# Altium PCB PCB1.PcbDoc
Units mm, origin at the board's own origin, x right, y up, seen from the top; angles counter-clockwise.
Board outline 57.35 x 68.96 mm, 2 copper layers (Top Layer, Bottom Layer); 19 components, 15 nets, 79 pads, 2 vias.
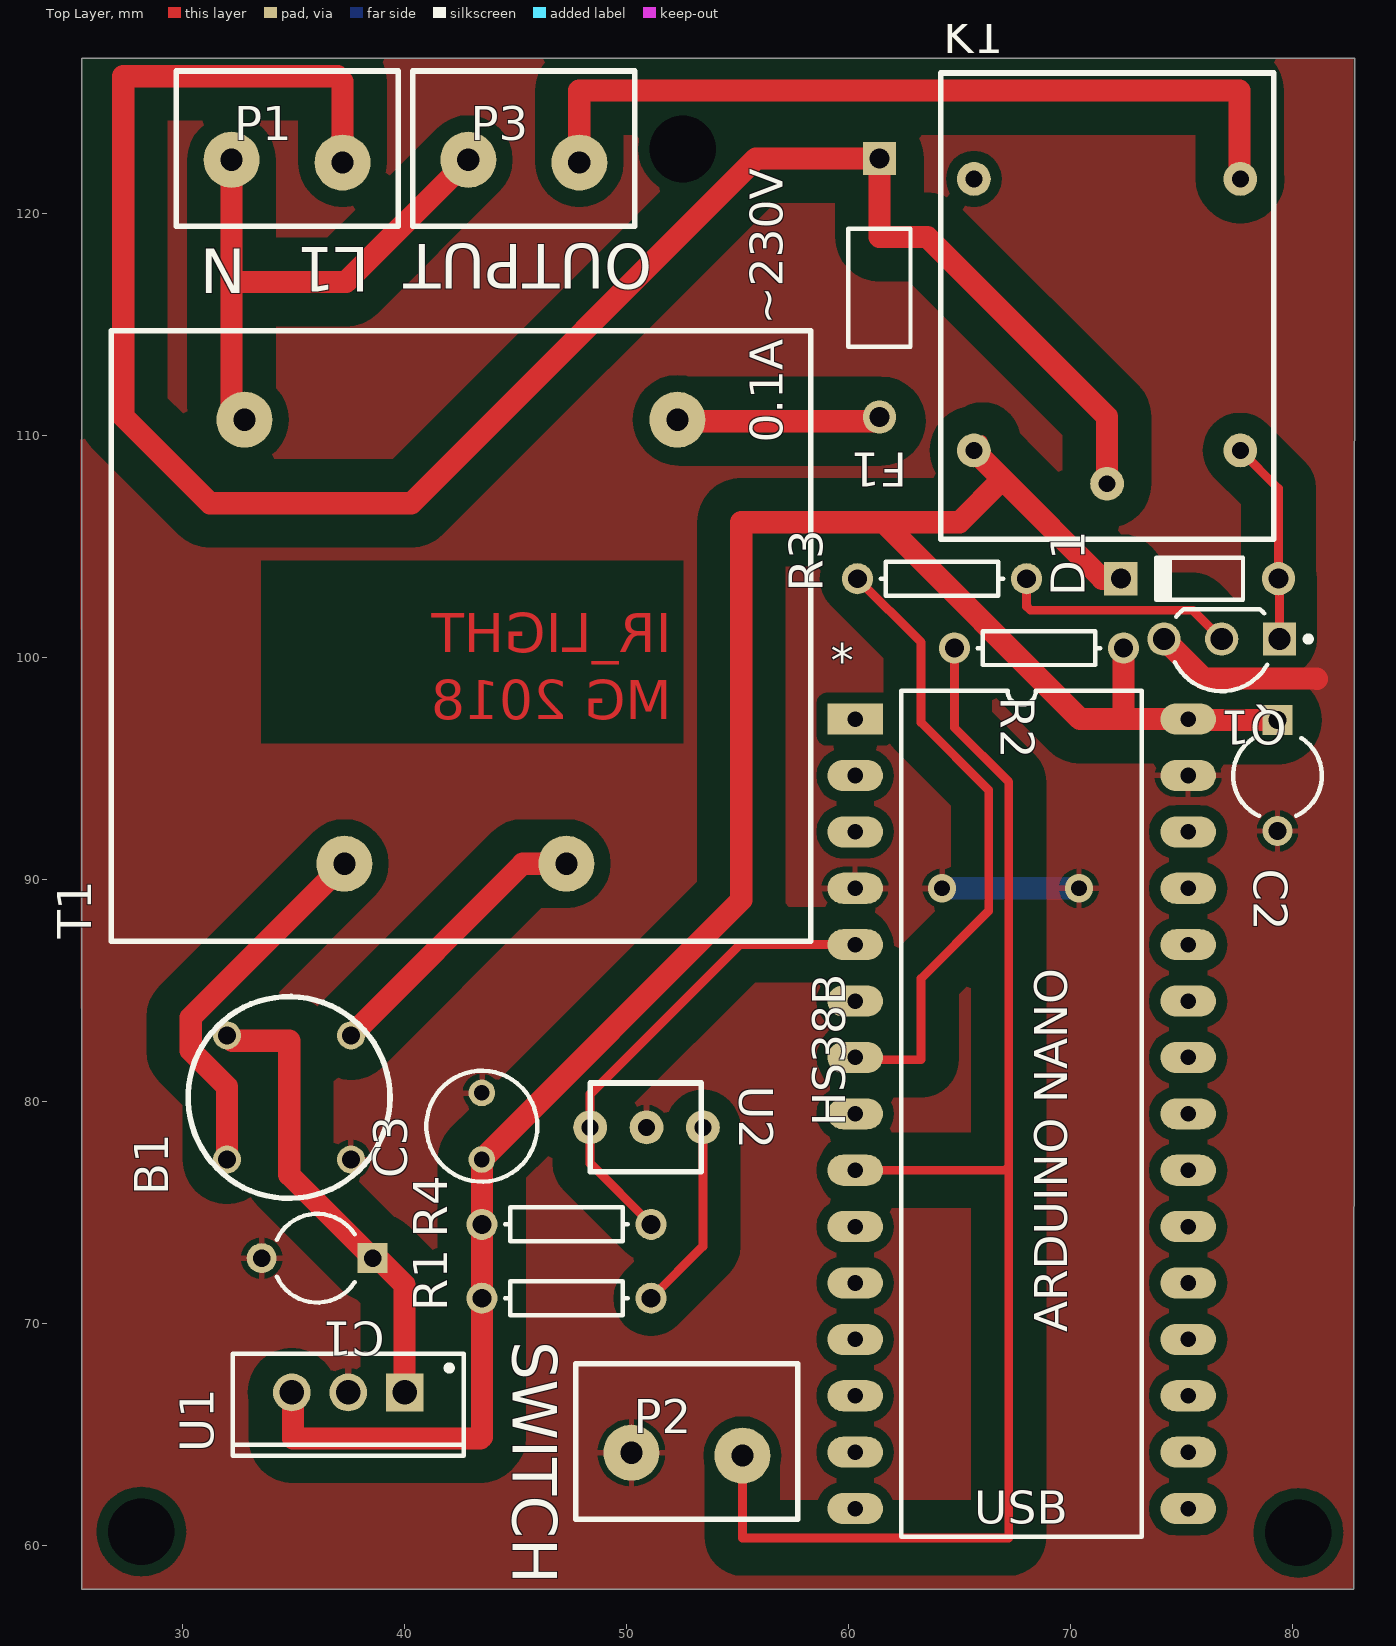
[diagram p0: Top Layer view]
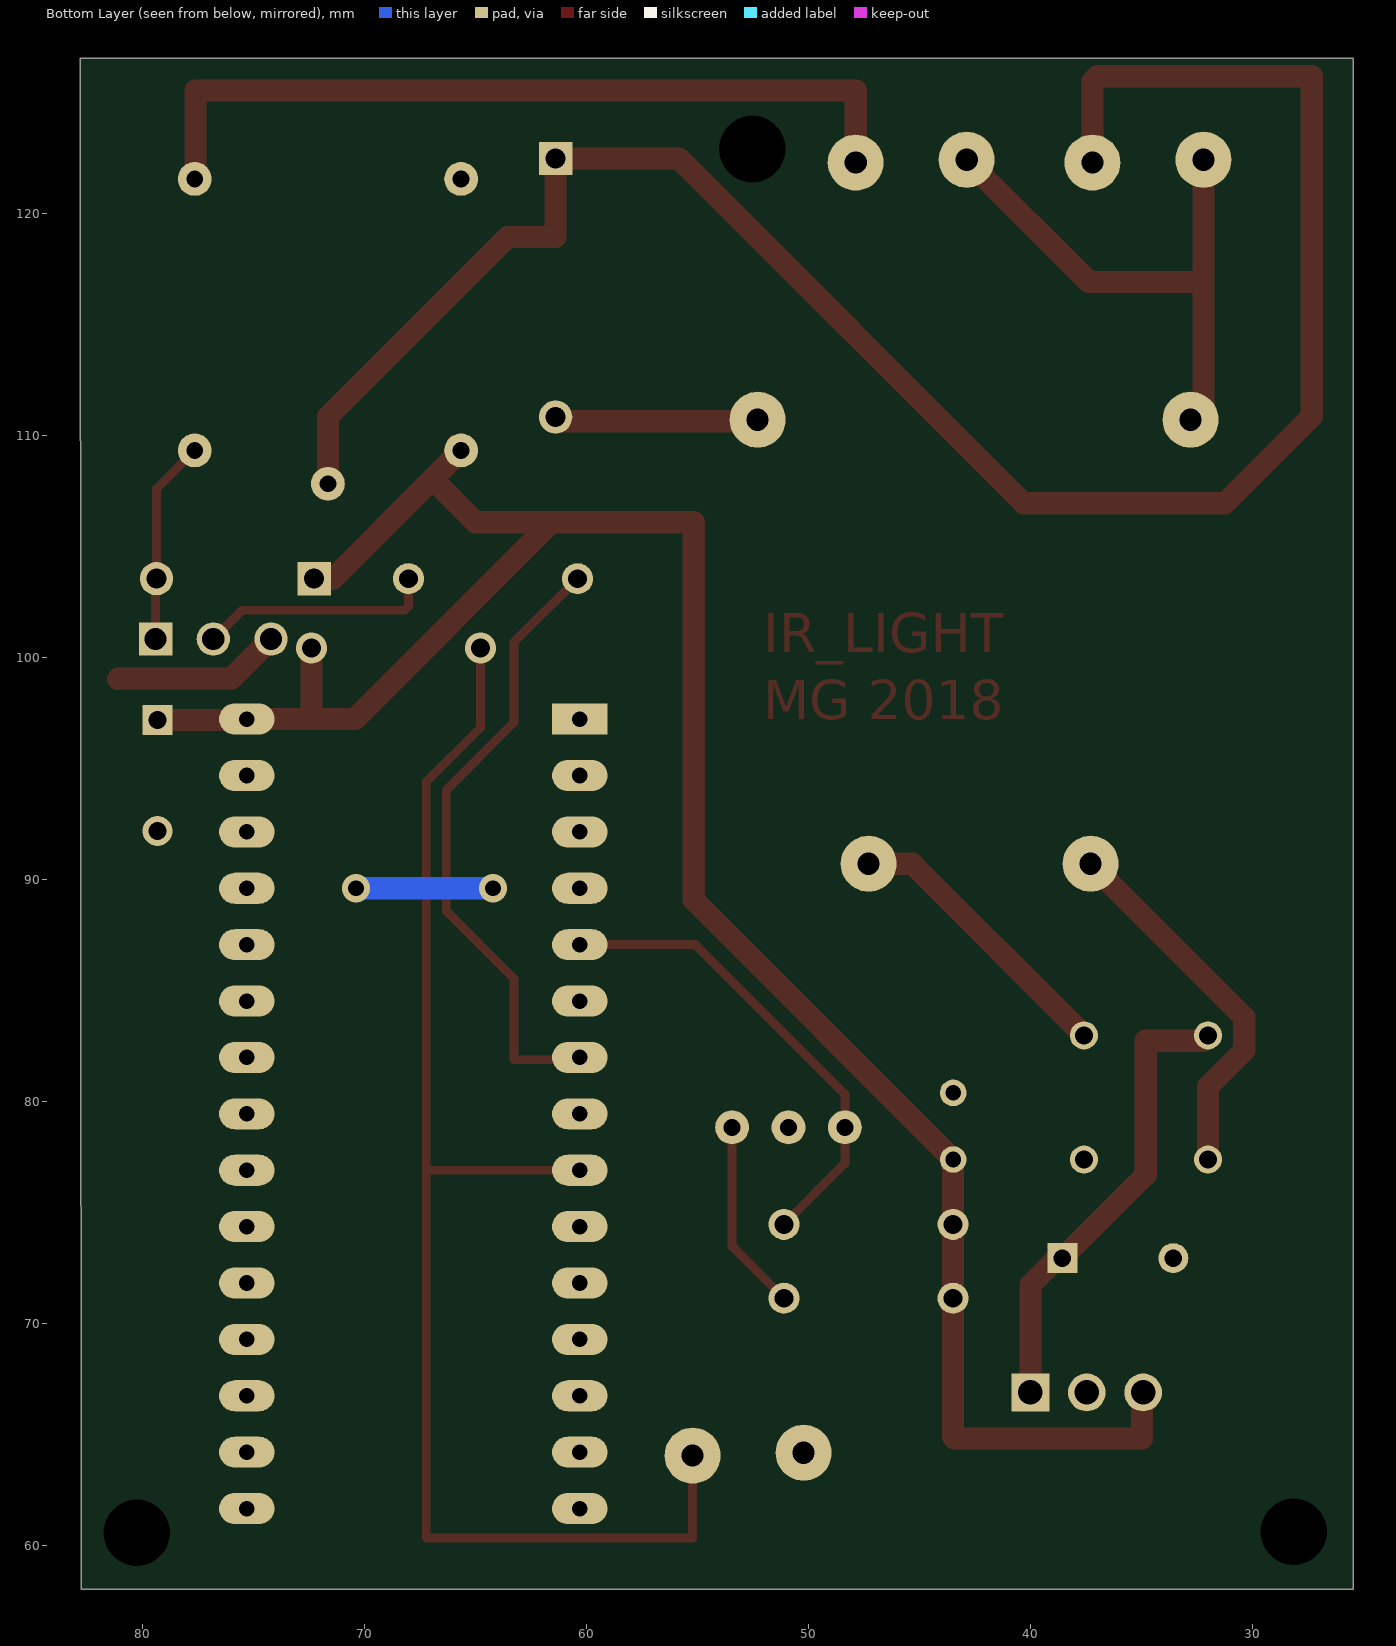
[diagram p1: Bottom Layer view, seen from below]

## Layer stack, top to bottom
Top Solder: solder mask 0.0102, Solder Resist, Dk 3.5
Top Layer: signal copper 0.0356
Dielectric 1: dielectric 0.32, FR-4, Dk 4.8
Bottom Layer: signal copper 0.0356
Bottom Solder: solder mask 0.0102, Solder Resist, Dk 3.5

## Board outline
82.753,58.039 25.451,58.039 25.451,126.898 25.451,126.949 25.451,127 82.804,127

## Design rules (kind name [scope] priority, off if disabled: settings)
Clearance highVoltage [InNet('L1') vs InNet('N')] p1: gap=2 ignorepadtopadclearanceinfootprint=FALSE
Clearance [All] p2: gap=0.5 ignorepadtopadclearanceinfootprint=FALSE except(0.1: THPad-THPad; 0.2: Arc-SMDPad Arc-THPad Arc-Hole Track-SMDPad Track-THPad Track-Hole SMDPad-SMDPad SMDPad-THPad THPad-Hole; 1.5: Arc-Fill Arc-Poly Arc-Region Track-Fill Track-Poly Track-Region; 2: Fill-Fill Fill-Poly Fill-Region Poly-Poly Poly-Region Region-Region)
Height [All] p1: minheight=0 maxheight=200 prefheight=12.7
HoleSize [All] p1: absolutevalues=TRUE maxlimit=3 minlimit=0.025 maxpercent=80.000 minpercent=20.000
MinimumSolderMaskSliver [All] p1: minsoldermaskwidth=0.014
PolygonConnect [All] p1: connectstyle=Relief reliefconductorwidth=0.254 reliefentries=4 polygonreliefangle="90 Angle" airgapwidth=0.254
RoutingVias [All] p1: holewidth=0.711 width=1.27 viastyle="Through Hole" minholewidth=0.711 minwidth=1.27 maxholewidth=0.711 maxwidth=1.27
SolderMaskExpansion [All] p1: expansion=0.092
Width Power [InNet('GND','VCC','L1','L1(1)','L1(2)','N','Power ~5V(1)','Power ~5V(2)','Power')] p1: maxlimit=1 minlimit=1 preferedwidth=1
Width [All] p2: maxlimit=0.4 minlimit=0.4 preferedwidth=0.4
27 further rules are at their usual default settings.

## Components (designator, comment, footprint, x,y, rotation, side; value= is the part's Value field where it differs from the comment)
* "ArduinoNanoV1" DIP30 60.3,97.231 r0 top
B1 "RB156 rectifier" RB15 34.798,80.188 r90 top
C1 "Cap2" CAPR5-4X5 36.068,72.949 r180 top value=470uF
C2 "Cap2" CAPR5-4X5 79.324,94.691 r270 top value=470uF
C3 "Cap2" Capacitor 43.485,77.394 r90 top value=10u
D1 "Diode 1N4148" DO-35 75.819,103.556 r180 top
F1 "Fuse 1" PIN-W2/E2.8 61.392,116.662 r270 top
K1 "Relay-SPDT" RELAY_OMRON_G5LE-1 65.648,109.334 r90 top
P1 "230V AC" ARK2 32.211,122.428 r0 top
P2 "SWITCH" ARK2 50.22,64.186 r0 top
P3 "OUTPUT" ARK2 42.875,122.428 r0 top
Q1 "BC547C" ONSC-TO-92-3-29-10_BL 76.81,100.838 r180 top
R1 "Res1" AXIAL-0.3 47.295,71.145 r180 top value=100
R2 "Res1" AXIAL-0.3 68.58,100.432 r0 top value=1k
R3 "Res1" AXIAL-0.3 64.211,103.556 r180 top value=1k
R4 "Res1" AXIAL-0.3 47.295,74.473 r180 top value=10k
T1 "Trans" "trafo HAHN 12V 3VA" 42.291,101.219 r180 top
U1 "L7805CV" TO220 37.465,66.904 r180 top
U2 "HS38B" HS38B_3pin 48.362,78.842 r0 top

## Footprints (in the part's own frame and the unit in brackets; to place one, negate y for a bottom-side part, rotate by r counter-clockwise, add the part's x,y. Pads: shape width x height; smd on the part's side, far side on the other; paste and mask are expansions set on the pad)
ARK2 [mm]
  round 2.524 hole 1: 1(0,0) 2(5,-0.127)
  silkscreen extent -2.5,-3 7.5,4
AXIAL-0.3 [mm] "Axial Device, Thru-Hole; 2 Leads; 0.3 in Pin Spacing"
  round 1.4 hole 0.85: 1(-3.81,0) 2(3.81,0)
  silkscreen extent -2.77,-0.76 2.77,0.76
Capacitor [mm]
  round 1.2 hole 0.7: 1(0,0) 2(3,0)
  silkscreen extent -1,-2.5 4,2.5
CAPR5-4X5 [mm] "Capacitor; 2 Leads"
  rect 1.35x1.35 hole 0.8: 1(-2.5,0)
  round 1.35 hole 0.8: 2(2.5,0)
  silkscreen extent -1.69,-2 1.82,2
DIP30 [mm]
  rect 2.5x1.4 hole 0.7: 1(0,0)
  oval 2.5x1.4 hole 0.7: 2(0,-2.54) 3(0,-5.08) 4(0,-7.62) 5(0,-10.16) 6(0,-12.7) 7(0,-15.24) 8(0,-17.78) 9(0,-20.32) 10(0,-22.86) 11(0,-25.4) 12(0,-27.94) 13(0,-30.48) 14(0,-33.02) 15(0,-35.56) 16(15,-35.56) 17(15,-33.02) 18(15,-30.48) 19(15,-27.94) 20(15,-25.4) 21(15,-22.86) 22(15,-20.32) 23(15,-17.78) 24(15,-15.24) 25(15,-12.7) 26(15,-10.16) 27(15,-7.62) 28(15,-5.08) 29(15,-2.54) 30(15,0)
  silkscreen extent 2.08,-36.83 12.92,1.27
DO-35 [mm] "Diode, Axial; Body 3.8 x 1.9 mm (LxDia. max), Lead Dia. 0.53 mm (max)"
  round 1.5 hole 0.9: 1(-3.55,0)
  rect 1.5x1.5 hole 0.9: 2(3.55,0)
  silkscreen extent -1.95,-0.95 2.05,0.95
HS38B_3pin [mil]
  round 60 hole 30: 1(200,0) 2(100,0) 3(0,0)
  silkscreen extent 0,-79 197,79
ONSC-TO-92-3-29-10_BL [mm] "TO, 3-Leads, Body Dia 4.7 mm, Pitch 2.6 mm"
  rect 1.5x1.5 hole 1: 1(-2.6,0)
  round 1.5 hole 1: 2(0,0) 3(2.6,0)
  silkscreen extent -4.03,-1.34 2.11,2.35, body extent -2.36,-1.34 2.35,2.35, height 10.41
PIN-W2/E2.8 [mm] "Thru-Hole; 2 Leads"
  rect 1.5x1.5 hole 0.9: 1(-5.825,0)
  round 1.5 hole 0.9: 2(5.825,0)
  silkscreen extent -2.65,-1.4 2.65,1.4
RB15 [mil]
  round 50 hole 32: 0(-110,-110) 1(110,110) 2(-110,110) 3(110,-110)
  silkscreen extent -179,-179 179,179
RELAY_OMRON_G5LE-1 [mil]
  round 60 hole 30: 1(-59.06,-236.22) 2(481.5,0) 3(481.5,-472.44) 4(0,-472.44) 5(0,0)
  silkscreen extent -157,-531 669,59
TO220 [mm] "TO, Thru-Hole, Vertical, Heatsink Mounted; 3 In-Line Leads; Pitch 2.54 mm"
  rect 1.7x1.7 hole 1.1: 1(-2.54,0)
  round 1.7 hole 1.1: 2(0,0) 3(2.54,0)
  silkscreen extent -5.2,-1.75 5.2,2.85, body extent -5.25,-1.8 5.25,2.9, height 19.7
"trafo HAHN 12V 3VA" [mm]
  round 2.524 hole 1: 1(9.5,-9.5) 2(-10,-9.5) 3(-5,10.5) 4(5,10.5)
  silkscreen extent -16,-13.5 15.5,14

## Part data
C1 C2 C3: "Capacitor", PackageDescription="Capacitor; 2 Leads", PackageReference=CAPR5-4X5, Published=23-Sep-2002, Publisher="Altium Limited"
D1: "High Conductance Fast Diode", Code_JEDEC=DO-204-AH, ComponentLink1Description="Manufacturer Link", ComponentLink1URL=http://www.fairchildsemi.com/, ComponentLink2Description=Datasheet, ComponentLink2URL=http://www.fairchildsemi.com/ds/1N%2F1N4148.pdf, DatasheetVersion=1997, LatestRevisionDate=17-Jul-2002, LatestRevisionNote="Re-released for DXP Platform.", PackageDescription="Diode, Axial; Body 3.8 x 1.9 mm (LxDia. max), Lead Dia. 0.53 mm (max)", PackageReference=DO-35, Published=8-Jun-2000, Publisher="Altium Limited"
F1: "Fuse", current=0.1A, LatestRevisionDate=17-Jul-2002, LatestRevisionNote="Re-released for DXP Platform.", PackageDescription="Thru-Hole; 2 Leads", PackageReference=PIN-W2/E2.8, Published=8-Jun-2000, Publisher="Altium Limited"
K1: "Single-Pole Dual-Throw Relay", LatestRevisionDate=17-Jul-2002, LatestRevisionNote="Re-released for DXP Platform.", PackageReference=MODULE5B, Published=24-Mar-1999, Publisher="Altium Limited"
P1 P2 P3: library part "Header 2", "Header, 2-Pin", LatestRevisionDate=17-Jul-2002, LatestRevisionNote="Re-released for DXP Platform.", Publisher="Altium Limited"
Q1: "Amplifier Transistor, NPN Silicon, 3-Pin TO-92, Bulk Box", Manufacturer="On Semiconductor", Supplier Part Number 1=BC547COS-ND, ComponentLink1Description="Manufacturer URL", ComponentLink1URL=http://www.onsemi.com/, ComponentLink2Description=Datasheet, ComponentLink2URL=http://www.onsemi.com/pub_link/Collateral/BC546-D.PDF, ComponentLink3Description="Package Specification", ComponentLink3URL=http://www.onsemi.cn/pub_link/Collateral/2N6426-D.PDF, DatasheetVersion="Rev. 7", fT Min (MHz)=150, IC Continuous (A)=0.1, Mounting Technology="Through Hole", PackageDescription="3-Pin Transistor Outline, Body 4.825 x 3.685 mm, Pitch 1.27 mm", PackageReference=TO-92-3-29-11_AM_SL, PackageVersion="Rev. AM", Packing="Bulk Box", PartNumber=BC547C, Polarity=NPN, RoHS=FALSE, Supplier 1=Digi-Key
R1 R2 R3 R4: "Resistor", LatestRevisionDate=17-Jul-2002, LatestRevisionNote="Re-released for DXP Platform.", PackageDescription="Axial Device, Thru-Hole; 2 Leads; 0.3 in Pin Spacing", PackageReference=AXIAL-0.3, Published=8-Jun-2000, Publisher="Altium Limited"
T1: "Transformer", input voltage=230V, output voltage=12V, LatestRevisionDate=08-Jul-2005, LatestRevisionNote="Mech Layer 1 removed.", PackageDescription="Transformer; 4 Leads", PackageReference=TRANS, Published=24-Mar-1999, Publisher="Altium Limited"
U1: "Positive Voltage Regulator, 5V, 3-Pin TO-220", ComponentLink1Description="Manufacturer URL", ComponentLink1URL=http://www.st.com, ComponentLink2Description=Datasheet, ComponentLink2URL=http://www.st.com/internet/com/TECHNICAL_RESOURCES/TECHNICAL_LITERATURE/DATASHEET/CD00000444.pdf, ComponentLink3Description="Package Specification", ComponentLink3URL=http://www.st.com/internet/com/TECHNICAL_RESOURCES/TECHNICAL_LITERATURE/PACKAGE_INFORMATION/CD00004649.pdf, DatasheetVersion=Nov-2011, PackageDescription="TO, Thru-Hole, Vertical, Heatsink Mounted; 3 In-Line Leads; Pitch 2.54 mm", PackageReference=TO220, PackageVersion=ver3.0, PartNumber=L7805CV

## Free pads (board coordinates)
  round 1.524 hole 3: HOLE(28.143,60.63) HOLE(52.527,122.911) HOLE(80.264,60.579)

## Via types
v1: diameter 1.27, hole 0.711, Top Layer to Bottom Layer, 2 vias

## Nets (pads, with @x,y where several pads share a name; then routed paths per layer and width w, separated by ;. In a path a pad name is that pad's centre, name@x,y a point inside that pad or via, vN(x,y) a via of type N, cw(c..) or ccw(c..) an arc to the next point about the centre after c; other vN are vias at no path point)
GND: *.4 *.29 B1.0 C1.2 C2.2 C3.2 P2.1 Q1.3 U1.2 U2.2 | length 13.9
  Top Layer w1: U2.2 U2.2@50.902,78.892 ; Q1.3 75.988,99.06 81.077,99.06 81.102,99.035
  Bottom Layer w1: v1(64.211,89.611) v1(70.383,89.611)
L1: F1.1 K1.1 P1.2 | length 91.2
  Top Layer w1: P1.2 37.211,125.959 36.98,126.19 27.333,126.19 27.333,110.857 31.233,106.957 40.307,106.957 55.838,122.487 F1.1 61.392,118.952 63.547,118.952 71.648,110.851 K1.1
L1(1): F1.2 T1.2 | length 9.2
  Top Layer w1: T1.2 52.359,110.651 F1.2@61.468,110.651
L1(2): K1.3 P3.2 | length 37
  Top Layer w1: P3.2 47.875,125.548 77.619,125.548 77.619,121.594 K1.3
N: P1.1 P3.1 T1.1 | length 24.9
  Top Layer w1: P1.1 32.211,116.916 ; T1.1 32.211,111.299 32.211,116.916 ; P3.1 37.363,116.916 32.211,116.916
Net*_5: *.5 R4.1 U2.3 | length 21.7
  Top Layer w0.4: R4.1 48.362,77.216 U2.3 48.362,80.34 55.093,87.071 *.5
Net*_7: *.7 R3.2 | length 28.4
  Top Layer w0.4: *.7 60.401,81.89 63.271,81.89 63.271,85.547 66.319,88.595 66.319,94.031 63.271,97.079 63.271,100.686 R3.2
Net*_9: *.9 P2.2 R2.1 | length 63.8
  Top Layer w0.4: P2.2 55.22,60.35 67.219,60.35 67.219,77.078 ; *.9 67.053,76.911 67.219,77.078 ; R2.1 64.77,96.853 67.219,94.404 67.219,77.078
NetD1_1: D1.1 K1.4 Q1.1 | length 9.2
  Top Layer w0.4: K1.4 79.369,107.613 D1.1 79.41,103.515 Q1.1
NetQ1_2: Q1.2 R3.1 | length 10.6
  Top Layer w0.4: R3.1 68.021,102.311 68.199,102.133 75.514,102.133 Q1.2
NetR1_1: R1.1 U2.1 | length 8.7
  Top Layer w0.4: R1.1 53.442,73.482 U2.1
Power: B1.1 C1.1 U1.1 | length 21
  Top Layer w1: B1.1 32.243,82.742 34.809,82.742 34.809,76.708 C1.1 38.811,72.949 40.005,71.755 U1.1
"Power ~5V(1)": B1.3 T1.3 | length 12.9
  Top Layer w1: B1.3 45.329,90.719 T1.3
"Power ~5V(2)": B1.2 T1.4 | length 16.9
  Top Layer w1: B1.2 32.004,80.67 30.369,82.305 30.369,83.797 T1.4
VCC: *.30 C2.1 C3.1 D1.2 K1.5 R1.2 R2.2 R4.2 U1.3 | length 103.1
  Top Layer w0.4: K1.5@66.04,109.804 K1.5@66.071,109.773
  Top Layer w1: U1.3 34.976,66.853 34.976,64.821 43.409,64.821 43.485,64.897 R1.2 R4.2 C3.1 55.169,89.078 55.169,106.096 61.57,106.096 ; K1.5 66.943,108.04 ; D1.2 71.426,103.556 66.943,108.04 ; R2.2 72.39,97.511 72.669,97.231 ; C2.1 75.34,97.191 *.30 72.669,97.231 ; 61.57,106.096 70.434,97.231 72.669,97.231 ; 61.57,106.096 64.999,106.096 66.943,108.04
pads on no net: *.1 *.2 *.3 *.6 *.8 *.10 *.11 *.12 *.13 *.14 *.15 *.16 *.17 *.18 *.19 *.20 *.21 *.22 *.23 *.24 *.25 *.26 *.27 *.28 K1.2

## Polygon pours and split planes (outlines as drawn)
GND on Top Layer "GND_L01_P006" (solid, pour order 6): 25.375,127 82.728,127 82.728,58.014 25.451,58.038 25.451,58.547

## Other copper
Top Layer:
  text "IR_LIGHT / MG 2018" at 52.045,96.647 h3

## Silkscreen, mask and mechanical layers (free items; w line width, h text height)
Top Overlay:
  text "OUTPUT" at 51.156,118.618 h2 r180
  text "L1" at 38.405,118.491 h2 r180
  text "N" at 32.842,118.415 h2 r180
  text "0.1A ~230V" at 57.048,109.677 h1.5 r90
  text "HS38B" at 59.842,78.892 h1.5 r90
  text "ARDUINO NANO" at 69.85,69.621 h1.5 r90
  text "SWITCH" at 44.882,69.215 h2 r270
  text "USB" at 65.659,60.985 h1.5